# EAGLE board Komar (EAGLE 9.6.2)
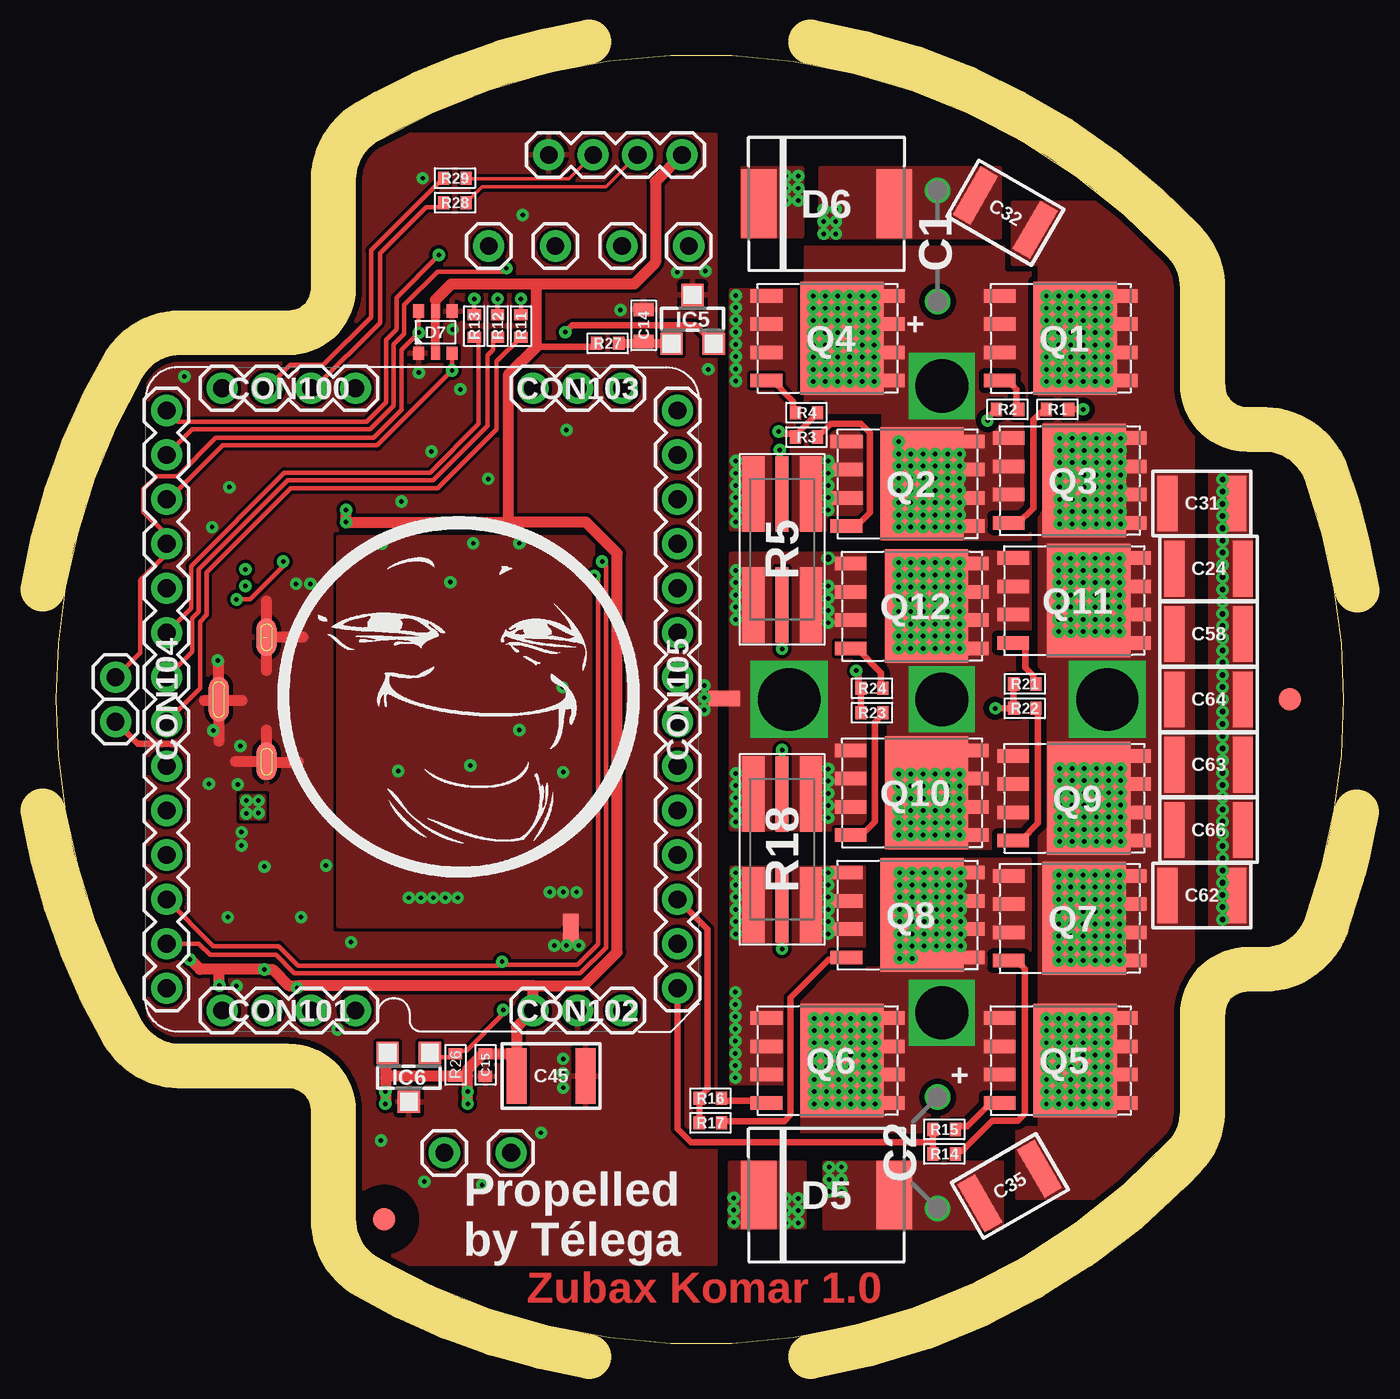
[diagram p0: board, top side]
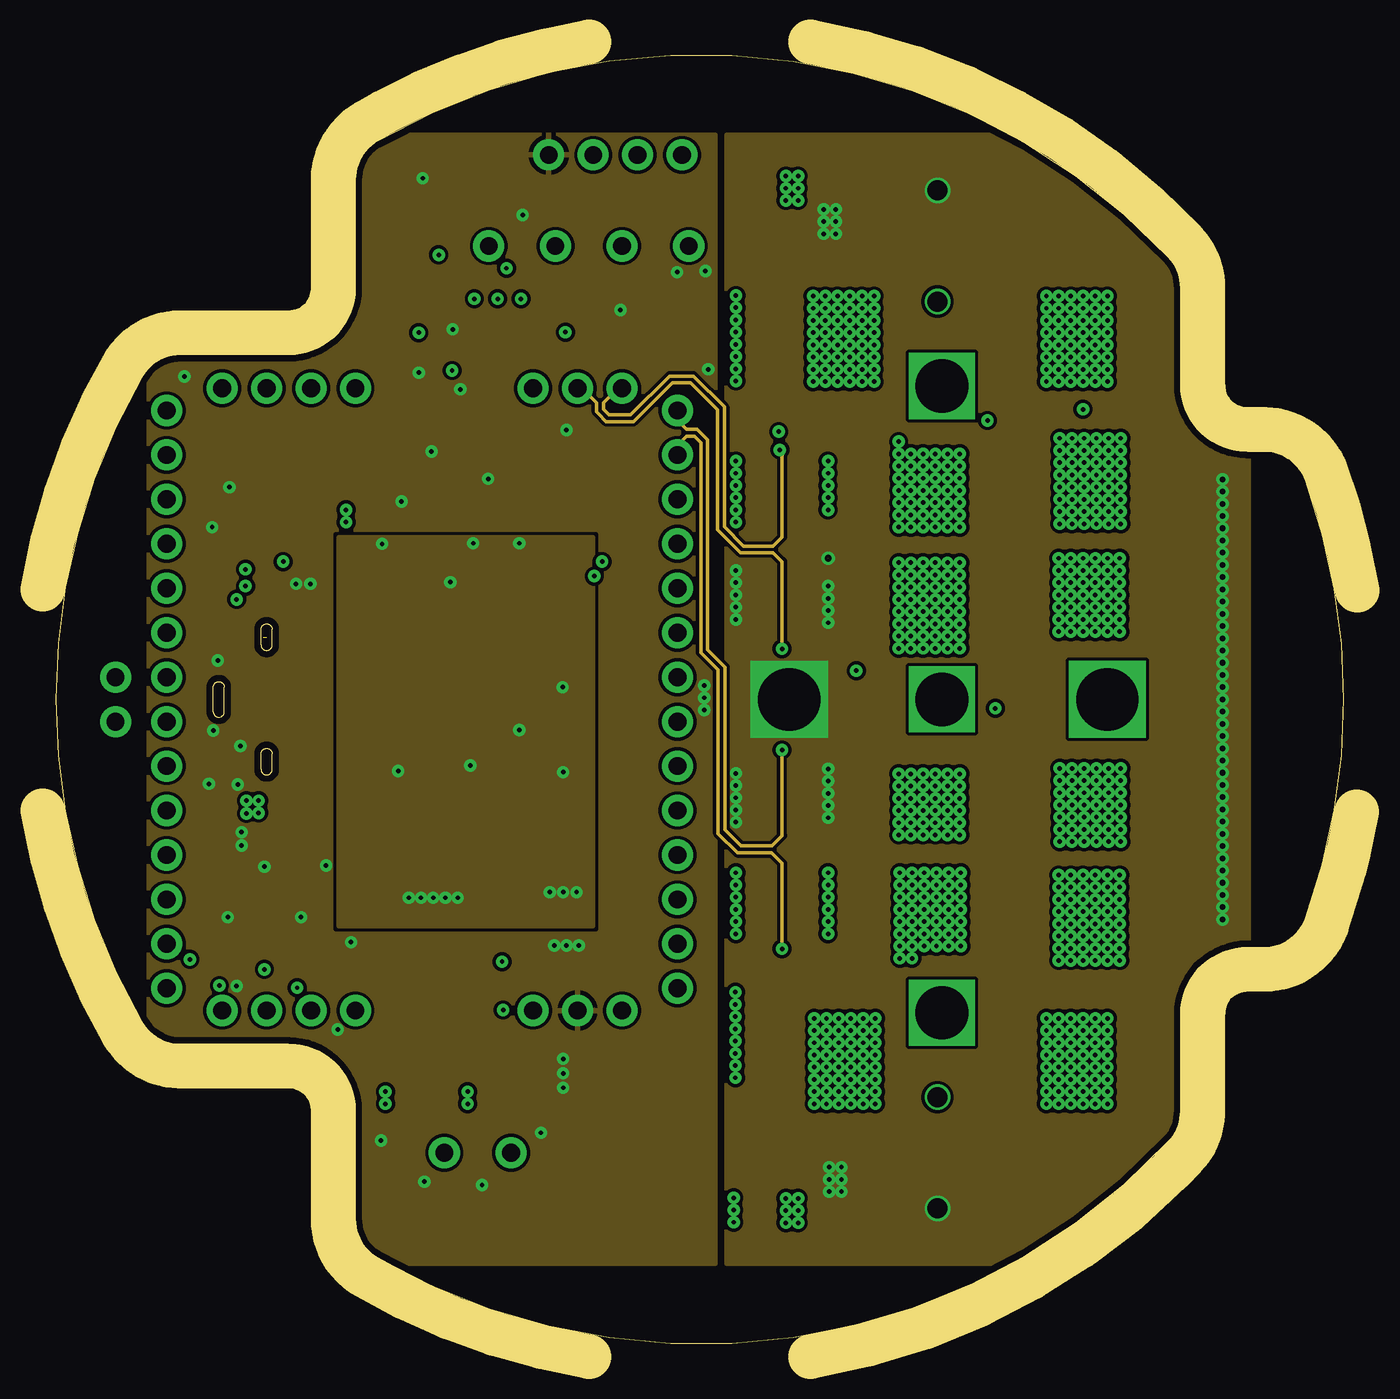
[diagram p1: board, inner layer Route2]
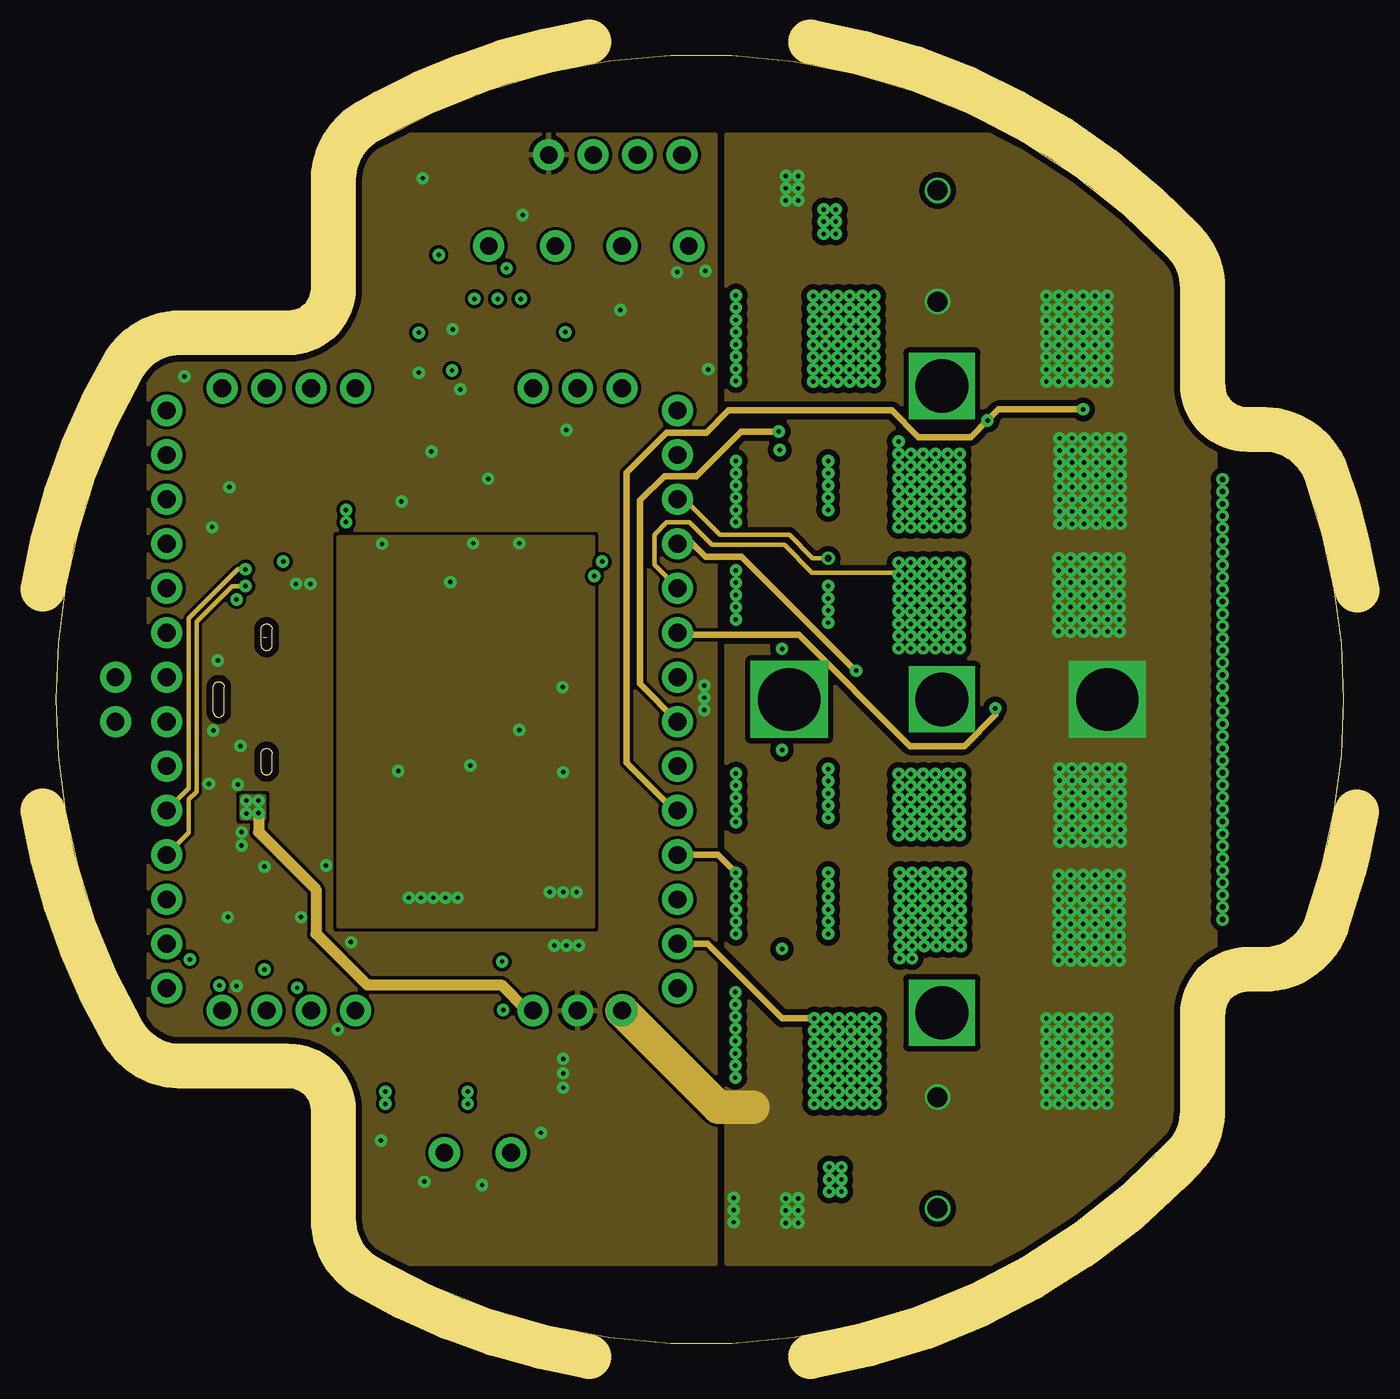
[diagram p2: board, inner layer Route15]
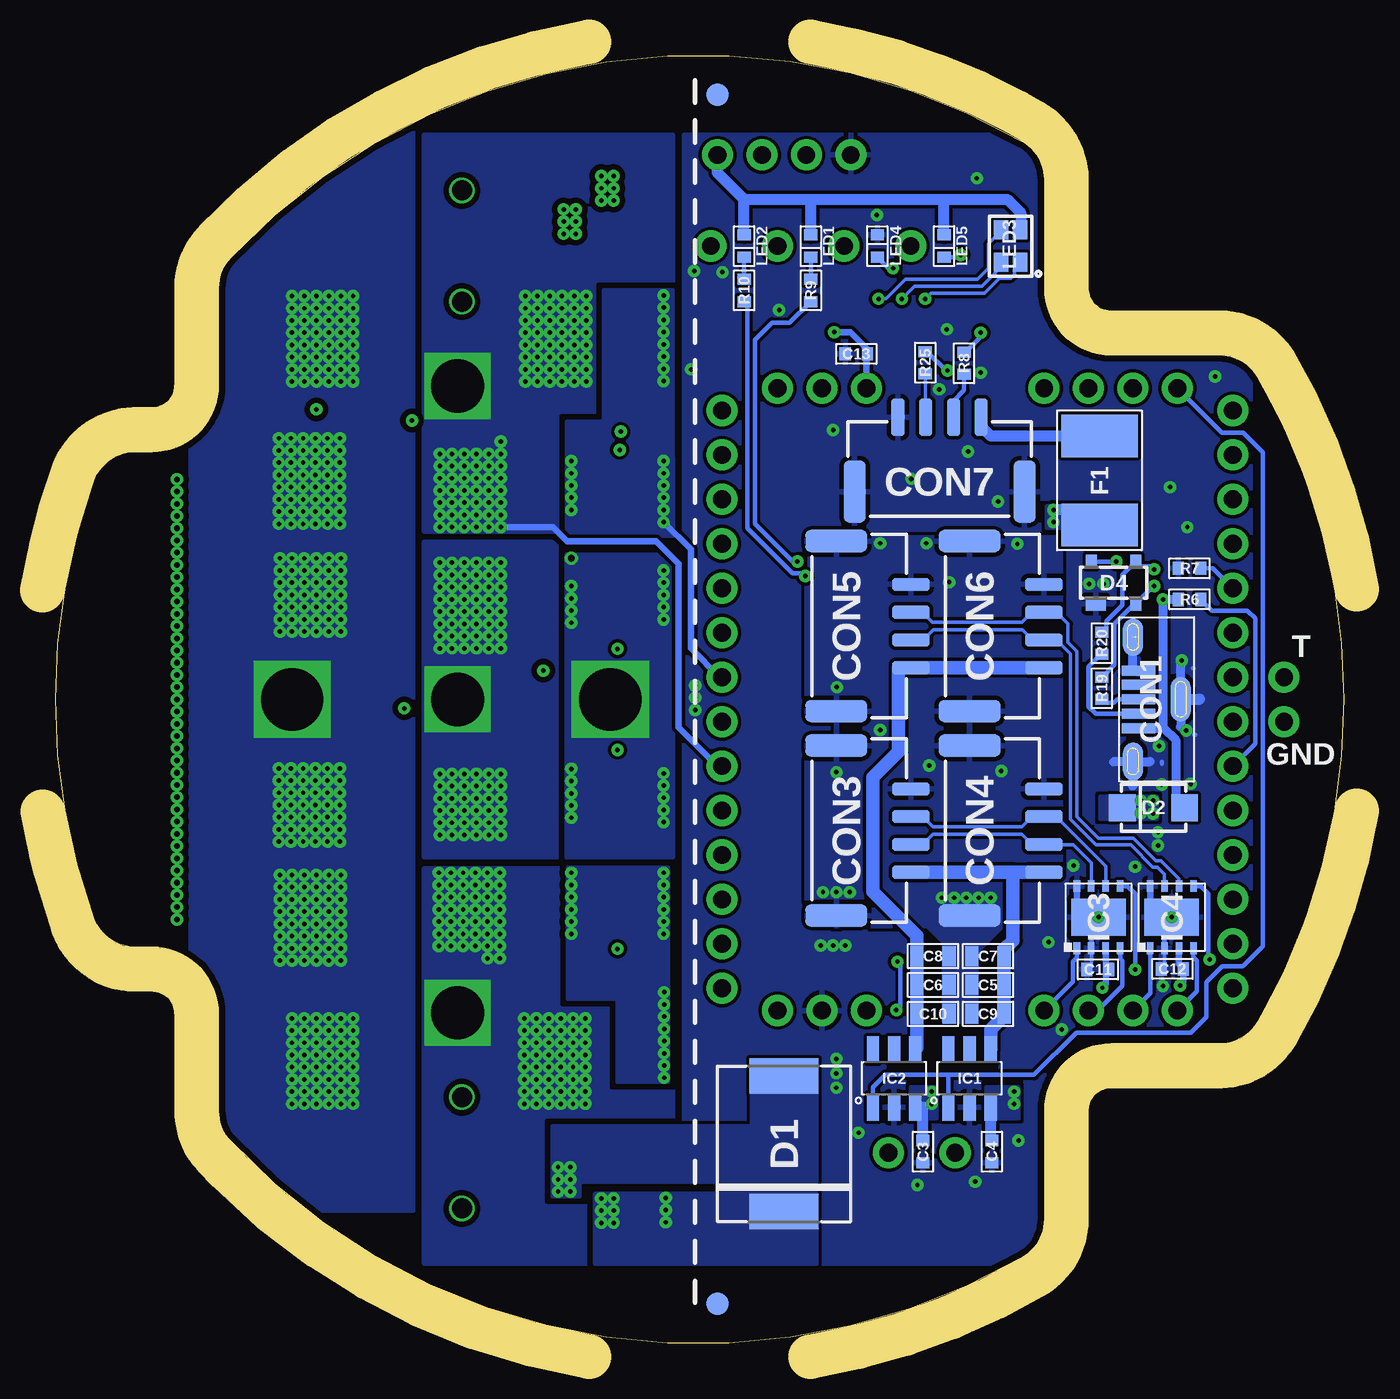
[diagram p3: board, bottom side, seen from below]

Size 57.99 x 57.94 mm. Coordinates in mm from the lower left corner, seen from the top.
Outline: 50.64,14.82 arc-90 53.64,17.82 54.4,17.82 arc70 56.28,19.14 arc40 56.28,38.8 arc70 54.4,40.12 53.64,40.12 arc-90 50.64,43.12 50.64,47.49 arc43 50.1,48.86 arc77 14.49,54.08 arc60 13.49,52.35 13.49,47.47 arc-90 10.49,44.47 5.62,44.47 arc60 3.89,43.47 arc60 3.89,14.47 arc60 5.62,13.47 10.49,13.47 arc-90 13.49,10.47 13.49,5.59 arc60 14.49,3.85 arc77 50.1,9.08 arc43 50.64,10.45 50.64,14.82
Copper layers (1+2*15+16): Top 0.035mm / dielectric 0.12mm / Route2 0.035mm / dielectric 1.2mm / Route15 0.035mm / dielectric 0.12mm / Bottom 0.035mm
Design rules "design rules *": minimum track width 0.15mm, minimum drill 0.2mm, track to track 0.15mm, track to pad 0.15mm, pad to pad 0.15mm, via to via 0.15mm, smd to smd 0.15mm, copper to edge 0.3mm, drill to drill 0.2mm, minimum pad ring 0.125mm, minimum via ring 0.125mm, stop-mask expansion 1mil, vias tented up to drill 0.31mm, thermal gap 8mil
Net classes: 1 HV: clearance 0.25 mm to class 0, clearance 0.25 mm
Milling: 57 lines

## Footprints (pad centres in the part's own frame; a part is rotated, then mirrored left to right if it is on the bottom)
SIDE_10X22 = drill 0.9: + -2.5,-0.5; - 2.5,-0.5
C0402 = smd 0.5 x 0.6: 1 -0.5,0; 2 0.5,0
C0603 = smd 0.6 x 0.9: 1 -0.725,0; 2 0.725,0
C1210 = smd 0.9 x 2.5: 1 -1.55,0; 2 1.55,0
1051330011 = smd 0.45 x 1.5: 1 -1.3,-0.25; 2 -0.65,-0.25; 3 0,-0.25; 4 0.65,-0.25; 5 1.3,-0.25 | smd 2 x 0.9: P$1 0,-2.15 | smd 1.7 x 0.9 bottom: P$2 -2.8,0; P$5 2.8,0 | smd 1.7 x 0.9: P$3 2.8,0; P$4 -2.8,0 | smd 2 x 0.9 bottom: P$6 0,-2.15
1X01-PTH-2 = drill 0.8 pad 1.4: 1 0,0
JST_GH-4P-STRAIGHT = smd 0.6 x 1.7: 1 -1.875,-2.9; 2 -0.625,-2.9; 3 0.625,-2.9; 4 1.875,-2.9 | smd 1 x 2.8: M$0 -3.825,0.45; M$1 3.825,0.45
1X04-PTH-2 = drill 0.8 pad 1.4: 1 -3,0; 2 -1,0; 3 1,0; 4 3,0
DO-214AB(SMC) = smd 1.6 x 3.1: A 3.05,0; C -3.05,0
SOD123F = smd 1.2 x 1.2: A -1.4,0; C 1.4,0
SOT143B = smd 0.9 x 0.6: 1 -0.8,-0.95 | smd 0.5 x 0.6: 2 1,-0.95; 3 1,0.95; 4 -1,0.95
SOT363 = smd 0.6 x 0.5: 1 -0.95,0.75; 3 -0.95,-0.75; 4 0.95,-0.75; 6 0.95,0.75 | smd 0.6 x 0.4: 2 -0.95,0; 5 0.95,0
F1812 = smd 1.9 x 3.45: P$1 -2,0; P$2 2,0
SOT26 = smd 1.2 x 0.55: 1 -1.3,0.95; 2 -1.3,0; 3 -1.3,-0.95; 4 1.3,-0.95; 5 1.3,0; 6 1.3,0.95
SOT782-1 = smd 0.525 x 0.3: 1 -1.4,0.975; 2 -1.4,0.325; 3 -1.4,-0.325; 4 -1.4,-0.975; 5 1.4,-0.975; 6 1.4,-0.325; 7 1.4,0.325; 8 1.4,0.975 | smd 1.65 x 2.45: PAD 0,0
SOT23B-3 = smd 1 x 1: 1 -0.95,-1.1; 2 0.95,-1.1; 3 0,1.1
LED0402 = smd 0.5 x 0.6: A -0.5,0; C 0.5,0
0606 = smd 0.65 x 0.85: + -0.425,-0.725; B 0.425,-0.725; G 0.425,0.725; R -0.425,0.725
MITOHONDRIK-TH = drill 0.8 pad 1.4: 1 -11.5,13; 2 -11.5,11; 3 -11.5,9; 4 -11.5,7; 5 -11.5,5; 6 -11.5,3; 7 -11.5,1; 8 -11.5,-1; 9 -11.5,-3; 10 -11.5,-5; 11 -11.5,-7; 12 -11.5,-9; 13 -11.5,-11; 14 -11.5,-13; 15 -9,-14; 16 -7,-14; 17 -5,-14; 18 3,-14; 19 5,-14; 20 7,-14; 21 9,-14; 22 11.5,-13; 23 11.5,-11; 24 11.5,-9; 25 11.5,-7; 26 11.5,-5; 27 11.5,-3; 28 11.5,-1; 29 11.5,1; 30 11.5,3; 31 11.5,5; 32 11.5,7; 33 11.5,9; 34 11.5,11; 35 11.5,13; 36 9,14; 37 7,14; 38 5,14; 39 3,14; 40 -5,14; 41 -7,14; 42 -9,14
HOLE_2.4 = drill 2.4 pad 2.8 square: 1 0,0
HOLE_2.8 = drill 2.8 pad 3.3 square: 1 0,0
PQFN8_5X6 = smd 1.42 x 0.61: 1 -2.9,1.905; 2 -2.9,0.635; 3 -2.9,-0.635; 4 -2.9,-1.905; 5 2.59,-1.905; 6 2.59,-0.635; 7 2.59,0.635; 8 2.59,1.905 | smd 3.75 x 5.1: P$1 0.5,0
R0402 = smd 0.5 x 0.6: 1 -0.5,0; 2 0.5,0
R2512-KELVIN = smd 3.4 x 1: 1 -2.5,1.3; 2 2.5,1.3; 11 -2.5,-1.3; 22 2.5,-1.3 | smd 3.4 x 0.6: S1 -2.5,0; S2 2.5,0
SENSE-0.6 = smd 0.1 x 0.1: IN 0,0 | drill 0.3 pad 0.6: SHELL 0,0
CONNECTION = smd 0.7 x 0.7: P$1 -0.35,0; P$2 0.35,0
FIDUCIA-MOUNT = smd 1.016 x 1.016: P$1 0,0

## Placement (x,y rotation side)
C1  330uF 63V  [SIDE_10X22]  39.2,49.37 90 top
C2  330uF 63V  [SIDE_10X22]  40.2,8.57 270 top
C3  0.1µF  [C0402]  18.95,8.62 270 bottom
C4  0.1µF  [C0402]  15.85,8.62 270 bottom
C5  4.7µF  [C0603]  16.03,16.12 0 bottom
C6  4.7µF  [C0603]  18.5,16.12 180 bottom
C7  4.7µF  [C0603]  16.03,17.42 0 bottom
C8  4.7µF  [C0603]  18.5,17.42 180 bottom
C9  4.7µF  [C0603]  16.03,14.82 0 bottom
C10  4.7µF  [C0603]  18.5,14.82 180 bottom
C11  0.1µF  [C0402]  11.08,16.82 180 bottom
C12  0.1µF  [C0402]  7.73,16.84 180 bottom
C13  0.1µF  [C0402]  21.95,44.52 0 bottom
C14  4.7µF  [C0603]  26.48,45.79 270 top
C15  0.1µF  [C0402]  19.35,12.52 90 top
C24  4.7µF  [C1210]  51.9,34.85 180 top
C31  4.7µF  [C1210]  51.6,37.79 180 top
C32  4.7µF  [C1210]  42.75,50.87 330 top
C35  4.7µF  [C1210]  42.95,7.07 30 top
C45  47µF  [C1210]  22.3,12.02 0 top
C58  4.7µF  [C1210]  51.9,31.91 180 top
C62  4.7µF  [C1210]  51.6,20.15 180 top
C63  4.7µF  [C1210]  51.9,26.03 180 top
C64  4.7µF  [C1210]  51.9,28.97 180 top
C66  4.7µF  [C1210]  51.9,23.09 180 top
CON1  USB-VERTICAL  [1051330011]  9.5,28.97 90 bottom
CON2  PINHEAD_1X01-2  [1X01-PTH-2]  2.7,29.97 270 top
CON3  CON-4P-TABS-STRAIGHT  [JST_GH-4P-STRAIGHT]  22.4,23.07 90 bottom
CON4  CON-4P-TABS-STRAIGHT  [JST_GH-4P-STRAIGHT]  16.4,23.07 90 bottom
CON5  CON-4P-TABS-STRAIGHT  [JST_GH-4P-STRAIGHT]  22.4,32.27 90 bottom
CON6  CON-4P-TABS-STRAIGHT  [JST_GH-4P-STRAIGHT]  16.4,32.27 90 bottom
CON7  CON-4P-TABS-STRAIGHT  [JST_GH-4P-STRAIGHT]  18.2,38.77 180 bottom
CON8  PINHEAD_1X04-2  [1X04-PTH-2]  25.2,53.47 0 top
CON9  PINHEAD_1X01-2  [1X01-PTH-2]  2.7,27.97 270 top
CON10  PINHEAD_1X01-2  [1X01-PTH-2]  19.5,49.37 0 top
CON11  PINHEAD_1X01-2  [1X01-PTH-2]  22.5,49.37 0 top
CON12  PINHEAD_1X01-2  [1X01-PTH-2]  25.5,49.37 0 top
CON13  PINHEAD_1X01-2  [1X01-PTH-2]  17.5,8.57 0 top
CON14  PINHEAD_1X01-2  [1X01-PTH-2]  20.5,8.57 0 top
CON15  PINHEAD_1X01-2  [1X01-PTH-2]  28.5,49.37 0 top
D1  SMC5K51A-M3/I  [DO-214AB(SMC)]  25.2,8.97 90 bottom
D2  NRVB120VLSFT1G  [SOD123F]  8.58,24.09 180 bottom
D4  DRTR5V0U2SR-7  [SOT143B]  10.38,34.22 0 bottom
D5  SMC5K51A-M3/I  [DO-214AB(SMC)]  34.7,6.67 0 top
D6  SMC5K51A-M3/I  [DO-214AB(SMC)]  34.7,51.27 0 top
D7  BAV99HDWQ-13  [SOT363]  17.1,45.49 90 top
F1  FUSE-1812  [F1812]  11,38.82 270 bottom
IC1  TPD3S014DBVR-SOT23-6  [SOT26]  16.85,11.92 90 bottom
IC2  TPD3S014DBVR-SOT23-6  [SOT26]  20.25,11.92 90 bottom
IC3  ATA6561-GBQW-N-HVSON8  [SOT782-1]  11.05,19.17 90 bottom
IC4  ATA6561-GBQW-N-HVSON8  [SOT782-1]  7.75,19.17 90 bottom
IC5  MCP9700AT-E/TTVAO-SOT23  [SOT23B-3]  28.68,46.07 0 top
IC6  11LC040T-E/TT  [SOT23B-3]  15.9,11.97 180 top
LED1  GREEN  [LED0402]  24,49.37 270 bottom
LED2  GREEN  [LED0402]  27,49.37 270 bottom
LED3  LTST-C19HE1WT  [0606]  15,49.37 180 bottom
LED4  ORANGE  [LED0402]  21,49.37 90 bottom
LED5  ORANGE  [LED0402]  18,49.37 270 bottom
MODULE2  MITOCHONDRIK_LV-TH  [MITOHONDRIK-TH]  16.5,28.97 180 top
PAD1  PAD-HOLE_2.4_SQUARE  [HOLE_2.4]  39.9,43.07 0 top
PAD2  PAD-HOLE_2.4_SQUARE  [HOLE_2.4]  39.9,14.87 180 top
PAD3  PAD-HOLE_2.4_SQUARE  [HOLE_2.4]  39.9,28.97 0 top
PAD4  PAD-HOLE_2.8_SQUARE  [HOLE_2.8]  33.03,28.97 180 top
PAD5  PAD-HOLE_2.8_SQUARE  [HOLE_2.8]  47.35,28.97 180 top
Q1  FDMS86368-F085  [PQFN8_5X6]  45.4,45.22 0 top
Q2  FDMS86368-F085  [PQFN8_5X6]  38.5,38.67 0 top
Q3  FDMS86368-F085  [PQFN8_5X6]  45.8,38.82 0 top
Q4  FDMS86368-F085  [PQFN8_5X6]  34.9,45.22 0 top
Q5  FDMS86368-F085  [PQFN8_5X6]  45.4,12.72 0 top
Q6  FDMS86368-F085  [PQFN8_5X6]  34.9,12.72 0 top
Q7  FDMS86368-F085  [PQFN8_5X6]  45.8,19.12 0 top
Q8  FDMS86368-F085  [PQFN8_5X6]  38.5,19.27 0 top
Q9  FDMS86368-F085  [PQFN8_5X6]  46,24.52 0 top
Q10  FDMS86368-F085  [PQFN8_5X6]  38.7,24.77 0 top
Q11  FDMS86368-F085  [PQFN8_5X6]  46,33.42 0 top
Q12  FDMS86368-F085  [PQFN8_5X6]  38.7,33.17 0 top
R1  4R3  [R0402]  45.1,42.02 180 top
R2  4R3  [R0402]  42.85,42.02 0 top
R3  4R3  [R0402]  33.8,40.77 0 top
R4  4R3  [R0402]  33.8,41.87 180 top
R5  1 mOhms  [R2512-KELVIN]  32.7,35.72 270 top
R6  1K  [R0402]  6.95,33.47 180 bottom
R7  1K5  [R0402]  6.95,34.87 180 bottom
R8  200R  [R0402]  17.1,44.09 270 bottom
R9  1K  [R0402]  24,47.37 90 bottom
R10  1K  [R0402]  27,47.37 90 bottom
R11  1K  [R0402]  20.95,45.77 270 top
R12  1K  [R0402]  19.9,45.77 270 top
R13  1K  [R0402]  18.85,45.77 270 top
R14  4R3  [R0402]  40,8.52 0 top
R15  4R3  [R0402]  40,9.62 0 top
R16  4R3  [R0402]  29.48,11.02 0 top
R17  4R3  [R0402]  29.48,9.92 0 top
R18  1 mOhms  [R2512-KELVIN]  32.7,22.22 90 top
R19  4R3  [R0402]  10.9,29.47 270 bottom
R20  4R3  [R0402]  10.9,31.49 270 bottom
R21  4R3  [R0402]  43.63,29.67 0 top
R22  4R3  [R0402]  43.63,28.57 0 top
R23  4R3  [R0402]  36.75,28.37 0 top
R24  4R3  [R0402]  36.75,29.47 0 top
R25  200R  [R0402]  18.85,44.12 270 bottom
R26  1K  [R0402]  18,12.52 270 top
R27  200R  [R0402]  24.85,44.99 180 top
R28  4R3  [R0402]  17.98,51.32 180 top
R29  4R3  [R0402]  17.98,52.42 180 top
S1  SENSE  [SENSE-0.6]  34.78,35.32 0 top
U$1  CONNECTION-SMD  [CONNECTION]  23.2,18.62 90 top
U$2  [YOBA_17X17]  10,20.97 0 top
U$3  CONNECTION-SMD  [CONNECTION]  30.1,29.02 0 top
U$5  FIDUCIALMOUNT  [FIDUCIA-MOUNT]  55.55,28.97 0 top
U$6  FIDUCIALMOUNT  [FIDUCIA-MOUNT]  14.8,5.57 0 top
U$7  FIDUCIALMOUNT  [FIDUCIA-MOUNT]  28.2,56.17 0 bottom
U$11  FIDUCIALMOUNT  [FIDUCIA-MOUNT]  28.2,1.77 0 bottom

## Library data of the parts
C1 C2 = mitohondrique; AEC-Q: AEC-Q200; DIGIKEY#: 565-2043-ND; LIFETIME: 7000 Hrs @ 105°C; MANF: United Chemi-Con; MANF#: ELXZ630ELL331MK20S; OPERATING_TEMP: -55°C ~ 105°C; PACKAGE: radial
C3 C4 C11 C12 = rc; AEC-Q: AEC-Q200; DIGIKEY#: 490-7998-1-ND; MANF: Murata Electronics; MANF#: GCM155R71C104KA55J; PACKAGE: 0402; VOLTAGE: 16V
C5-C10 C14 = rc; AEC-Q: AEC-Q200; DIGIKEY#: 490-12289-1-ND; MANF: Murata Electronics; MANF#: GRT188C81C475KE13D; OPERATING_TEMP: -55°C ~ 105°C; PACKAGE: 0603; VOLTAGE: 16V
C13 C15 = rc; AEC-Q: AEC-Q200; DIGIKEY#: 490-7998-1-ND; MANF: Murata Electronics; MANF#: GCM155R71C104KA55J; OPERATING_TEMP: -55°C ~ 125°C; PACKAGE: 0402; VOLTAGE: 16V
C24 C31 C32 C35 C58 C62-C64 C66 = rc; AEC-Q: AEC-Q200; DIGIKEY#: 490-14484-1-ND; MANF: Murata Electronics; MANF#: GCM32DC72A475KE02L; OPERATING_TEMP: -55°C ~ 125°C; PACKAGE: 1210; VOLTAGE: 100V
C45 = rc; ASSY: DNM; DIGIKEY#: 490-4844-1-ND; MANF: Murata Electronics; MANF#: GCM32ER70J476KE19L; OPERATING_TEMP: -55°C ~ 125°C; PACKAGE: 1210; VOLTAGE: 6.3 V
CON1 = Connectors; AEC-Q: ---; DIGIKEY#: WM10134TR-ND; MANF: Molex LLC; MANF#: 1051330011; OPERATING_TEMP: -35°C ~ 85°C
CON2 CON8-CON15 = pinhead
CON3-CON7 = Connectors; AEC-Q: ---; DIGIKEY#: 455-1580-2-ND; MANF: JST Sales America Inc; MANF#: BM04B-GHS-TBT(LF)(SN)(N); OPERATING_TEMP: -25°C ~ 85°C
D1 = TVS_diodes; AEC-Q: AEC-Q101; DIGIKEY#: SMC5K51A-M3/IGICT-ND; MANF: Vishay Semiconductor Diodes Division; MANF#: SMC5K51A-M3/I; REVERS_STANDOFF_V: 51V
D2 = Diodes; AEC-Q: AEC-Q101; DIGIKEY#: NRVB120VLSFT1GOSCT-ND; MANF: ON Semiconductor; MANF#: NRVB120VLSFT1G; OPERATING_TEMP: -65°C ~ 125°C
D4 = TVS_diodes; AEC-Q: AEC-Q101; DIGIKEY#: DRTR5V0U2SR-7DICT-ND; MANF: Diodes Incorporated; MANF#: DRTR5V0U2SR-7; OPERATING_TEMP: -65°C ~ 150°C (TJ)
D5 D6 = TVS_diodes; AEC-Q: AEC-Q101; ASSY: DNM; DIGIKEY#: SMC5K51A-M3/IGICT-ND; MANF: Vishay Semiconductor Diodes Division; MANF#: SMC5K51A-M3/I; REVERS_STANDOFF_V: 51V
D7 = Diodes; AEC-Q: AEC-Q101; DIGIKEY#: BAV99HDWQ-13DICT-ND; MANF: Diodes Incorporated; MANF#: BAV99HDWQ-13
F1 = rc; AEC-Q: AEC-Q200; DIGIKEY#: MF-MSMF010-2CT-ND; HOLD_CURRENT: 100 mA; MANF: Bourns Inc.; MANF#: MF-MSMF010-2; PACKAGE: 1812; TIME_TO_TRIP: 1.5 S; TRIP_CURRENT: 300 mA
IC1 IC2 = misc; AEC-Q: ---; DIGIKEY#: 296-38835-1-ND; MANF: Texas Instruments; MANF#: TPD3S014DBVR; OPERATING_TEMP: -40°C ~ 85°C
IC3 IC4 = serial_interfaces; AEC-Q: AEC-Q100; DATA_RATE: 5Mbps; DIGIKEY#: ATA6561-GBQW-NCT-ND; MANF: Microchip Technology; MANF#: ATA6561-GBQW-N; OPERATING_TEMP: -40°C ~ 150°C (TJ); VOLTAGE_SUPPLY: 4.5V ~ 5.5V
IC5 = misc; AEC-Q: AEC-Q100; DIGIKEY#: MCP9700AT-E/TTVAOTR-ND; MANF: Microchip Technology; MANF#: MCP9700AT-E/TTVAO
IC6 = misc; AEC-Q: ---; DIGIKEY#: 11LC040T-E/TTCT-ND; MANF: Microchip Technology; MANF#: 11LC040T-E/TT; OPERATING_TEMP: -40°C ~ 125°C (TA)
LED1 LED2 = rc; AEC-Q: ---; COLOR: GREEN; DIGIKEY#: 1830-IN-S42BT5GCT-ND; MANF: Inolux; MANF#: IN-S42BT5G
LED3 = misc; AEC-Q: ---; DIGIKEY#: 160-2162-1-ND; MANF: Lite-On Inc; MANF#: LTST-C19HE1WT; OPERATING_TEMP: -20°C ~ +80°C
LED4 LED5 = rc; AEC-Q: ---; COLOR: Amber; DIGIKEY#: 1830-IN-S42BT5ACT-ND; MANF: Inolux; MANF#: IN-S42BT5A
MODULE2 = zubax_modules; MANF: Zubax Robotics; MANF#: Mitochondrik
PAD1-PAD5 = PADS
Q1-Q12 = mosfet; AEC-Q: AEC-Q101; DIGIKEY#: FDMS86368-F085CT-ND; MANF: ON Semiconductor; MANF#: FDMS86368-F085; OPERATING_TEMP: -55°C ~ 175°C (TJ); PACKAGE: PQFN8-5x6
R1-R4 R14-R17 R19-R24 = rc; AEC-Q: AEC-Q200; DIGIKEY#: P4.3JCT-ND; MANF: Panasonic Electronic Components; MANF#: ERJ-2GEJ4R3X; OPERATING_TEMP: -55°C ~ 155°C; PACKAGE: 0402; TOLERANCE: 5%
R5 R18 = SHUNT_RESISTORS; AEC-Q: AEC-Q200; DIGIKEY#: CRE2512-FZ-R001E-3CT-ND; MANF: Bourns Inc.; MANF#: CRE2512-FZ-R001E-3; OPERATING_TEMP: -55°C ~ 170°C; POWER: 3W; TC: ±50ppm/°C; TOLERANCE: ±1%
R6 R9-R13 R26 = rc; AEC-Q: AEC-Q200; DIGIKEY#: P1.00KLCT-ND; MANF: Panasonic Electronic Components; MANF#: ERJ-2RKF1001X; OPERATING_TEMP: -55°C ~ 155°C; PACKAGE: 0402; TOLERANCE: 5%
R7 = rc; AEC-Q: AEC-Q200; DIGIKEY#: P1.50KLCT-ND; MANF: Panasonic Electronic Components; MANF#: ERJ-2RKF1501X; PACKAGE: 0402; TOLERANCE: 1%
R8 R25 R27 = rc; AEC-Q: AEC-Q200; DIGIKEY#: P200JCT-ND; MANF: Panasonic Electronic Components; MANF#: ERJ-2GEJ201X; OPERATING_TEMP: -55°C ~ 155°C; PACKAGE: 0402; TOLERANCE: 5%
R28 R29 = rc; AEC-Q: 1; DIGIKEY#: 2; PACKAGE: 0402; TOLERANCE: 1%
S1 U$1 U$3 U$5-U$7 U$11 = misc; BOM: EXCLUDE
U$2 = logo

## Nets
AGH1 [HV]: Q7.4 R14.2
AGH2 [HV]: Q5.4 R15.2
AGL1: Q8.4 R17.2
AGL2: Q6.4 R16.2
BEC_ENABLE_OUT: IC1.1 IC2.1 MODULE2.21
BGH1 [HV]: Q3.4 R1.2
BGH2 [HV]: Q1.4 R2.2
BGL1: Q4.4 R4.2
BGL2: Q2.4 R3.2
CAN1_LED: IC6.1 MODULE2.33 R10.1 R26.1
CAN1_RX: IC3.4 MODULE2.38
CAN1_TX: IC3.1 MODULE2.39
CAN1_VDD: C5.2 C7.2 C9.2 CON3.1 CON4.1 IC1.4
CAN2_LED: MODULE2.34 R9.1
CAN2_RX: IC4.4 MODULE2.36
CAN2_TX: IC4.1 MODULE2.37
CAN2_VDD: C6.2 C8.2 C10.2 CON5.1 CON6.1 IC2.4
CGH1 [HV]: Q11.4 R21.2
CGH2 [HV]: Q9.4 R22.2
CGL1: Q12.4 R24.2
CGL2: Q10.4 R23.2
GAIN_OUT: LED5.C MODULE2.22
GATE_ENABLE_OUT: LED4.A MODULE2.23
GND: C3.2 C4.2 C11.2 C12.2 C13.1 C14.1 C15.1 C45.2 CON1.5 CON1.P$1 CON1.P$2 CON1.P$3 CON1.P$4 CON1.P$5 CON1.P$6 CON7.4 CON7.M$0 CON7.M$1 CON8.1 CON9.1 D4.1 D7.1 D7.4 IC1.2 IC2.2 IC3.2 IC3.8 IC3.PAD IC4.2 IC4.8 IC4.PAD IC5.3 IC6.3 LED4.C MODULE2.41 R7.2 U$1.P$1 U$3.P$1
GNDD: C5.1 C6.1 C7.1 C8.1 C9.1 C10.1 CON3.4 CON3.M$0 CON3.M$1 CON4.4 CON4.M$0 CON4.M$1 CON5.4 CON5.M$0 CON5.M$1 CON6.4 CON6.M$0 CON6.M$1 U$1.P$2
GPIO1: CON2.1 D7.6 MODULE2.25 R8.1
GPIO2: D7.3 MODULE2.24 R25.1
LED_BLUE: MODULE2.29 R11.2
LED_GREEN: MODULE2.28 R12.2
LED_RED: MODULE2.27 R13.2
N$5: MODULE2.30 R6.1
N$6: CON7.1 F1.P$1
N$10: C14.2 IC5.1 R27.1
N$16: LED2.C R10.2
N$17: LED1.C R9.2
N$18: MODULE2.26 R7.1
N$19: CON7.2 R8.2
N$20: CON7.3 R25.2
N$21: CON3.2 CON4.2 IC3.7
N$22: CON3.3 CON4.3 IC3.6
N$25: CON8.3 R28.1
N$26: CON8.2 R29.1
N$44: CON5.3 CON6.3 IC4.6
N$46: CON5.2 CON6.2 IC4.7
N$51: D4.3 MODULE2.31 R20.1
N$52: CON1.3 R19.2
N$54: CON1.2 R20.2
N$55: D4.2 MODULE2.32 R19.1
N$58: LED3.R R13.1
N$59: LED3.G R12.1
N$60: LED3.B R11.1
PGND: C1.- C2.- C24.1 C31.1 C32.1 C35.1 C58.1 C62.1 C63.1 C64.1 C66.1 D1.A D5.A D6.A PAD4.1 Q10.1 Q10.2 Q10.3 Q12.1 Q12.2 Q12.3 R5.2 R5.22 R18.2 R18.22 S1.SHELL U$3.P$2
PHASE_A [HV]: MODULE2.2 PAD2.1 Q5.1 Q5.2 Q5.3 Q6.5 Q6.6 Q6.7 Q6.8 Q6.P$1 Q7.1 Q7.2 Q7.3 Q8.5 Q8.6 Q8.7 Q8.8 Q8.P$1
PHASE_A_CURRENT_SHUNT_N: MODULE2.13 R18.S1
PHASE_A_CURRENT_SHUNT_P: MODULE2.14 R18.S2
PHASE_A_GATE_HIGH [HV]: MODULE2.1 R14.1 R15.1
PHASE_A_GATE_LOW: MODULE2.3 R16.1 R17.1
PHASE_A_GND: MODULE2.4 Q6.1 Q6.2 Q6.3 Q8.1 Q8.2 Q8.3 R18.1 R18.11
PHASE_B [HV]: MODULE2.6 PAD1.1 Q1.1 Q1.2 Q1.3 Q2.5 Q2.6 Q2.7 Q2.8 Q2.P$1 Q3.1 Q3.2 Q3.3 Q4.5 Q4.6 Q4.7 Q4.8 Q4.P$1
PHASE_B_CURRENT_SHUNT_N: MODULE2.15 R5.S1
PHASE_B_CURRENT_SHUNT_P: MODULE2.16 R5.S2
PHASE_B_GATE_HIGH [HV]: MODULE2.5 R1.1 R2.1
PHASE_B_GATE_LOW: MODULE2.7 R3.1 R4.1
PHASE_B_GND: MODULE2.8 Q2.1 Q2.2 Q2.3 Q4.1 Q4.2 Q4.3 R5.1 R5.11
PHASE_C [HV]: MODULE2.10 PAD3.1 Q9.1 Q9.2 Q9.3 Q10.5 Q10.6 Q10.7 Q10.8 Q10.P$1 Q11.1 Q11.2 Q11.3 Q12.5 Q12.6 Q12.7 Q12.8 Q12.P$1
PHASE_C_GATE_HIGH [HV]: MODULE2.9 R21.1 R22.1
PHASE_C_GATE_LOW: MODULE2.11 R23.1 R24.1
PHASE_C_GND: MODULE2.12 S1.IN
TEMPERATURE_SENSOR: C13.2 IC5.2 MODULE2.17
UART_RX: MODULE2.20 R29.2
UART_TX: MODULE2.19 R28.2
USB_VBUS: CON1.1 D2.A D4.4 R6.2
VDC [HV]: C1.+ C2.+ C24.2 C31.2 C32.2 C35.2 C58.2 C62.2 C63.2 C64.2 C66.2 D1.C D5.C D6.C MODULE2.42 PAD5.1 Q1.5 Q1.6 Q1.7 Q1.8 Q1.P$1 Q3.5 Q3.6 Q3.7 Q3.8 Q3.P$1 Q5.5 Q5.6 Q5.7 Q5.8 Q5.P$1 Q7.5 Q7.6 Q7.7 Q7.8 Q7.P$1 Q9.5 Q9.6 Q9.7 Q9.8 Q9.P$1 Q11.5 Q11.6 Q11.7 Q11.8 Q11.P$1
VDD_5V: C3.1 C4.1 C11.1 C12.1 C15.2 C45.1 CON8.4 D2.C D7.2 D7.5 F1.P$2 IC1.3 IC2.3 IC3.3 IC3.5 IC4.3 IC4.5 IC6.2 LED1.A LED2.A LED3.+ LED5.A MODULE2.40 R26.2 R27.2

## Tracks (layer width: path | path; a pad name or v marks a point on that pad's centre or on a via)
AGH1
  Top 0.25: 43.4,17.06 43.05,17.06 Q7.4
  Top 0.3: 43.4,17.06 43.63,16.84 43.63,10.32 43.32,10.01 42.17,10.01 40.83,8.67 40.65,8.67 R14.2
AGH2
  Top 0.3: Q5.4 42.36,10.67 41.95,10.67 41.05,9.77 40.65,9.77 R15.2
AGL1
  Top 0.2: 29.98,9.99 R17.2 | 35.5,17.26 Q8.4
  Top 0.3: 35.5,17.26 34.8,17.26 33.08,15.54 33.08,10.27 32.8,9.99 29.98,9.99
AGL2
  Top 0.25: 30.08,10.92 R16.2
  Top 0.3: Q6.4 31.9,10.92 30.08,10.92
BEC_ENABLE_OUT
  Bottom 0.2: 17.8,12.07 13.95,12.07 12.05,13.97 6.9,13.97 6.2,14.67 6.2,16.24 5.48,16.97 4.55,16.97 3.65,17.87 3.65,40.09 4.53,40.97 5.5,40.97 MODULE2.21 | 17.8,12.07 20.65,12.07 21.2,11.52 IC2.1 | IC1.1 17.8,12.07
BGH1
  Top 0.3: Q3.4 43.35,36.91 44.01,37.58 44.01,41.55 44.33,41.87 44.45,41.87 R1.2
BGH2
  Top 0.3: R2.2 43.25,42.12 43.25,42.92 42.86,43.31 Q1.4
BGL1
  Top 0.3: R4.2 33.2,41.97 33.2,42.39 32.23,43.36 32.05,43.36 Q4.4
BGL2
  Top 0.3: R3.2 34.9,41.37 36.24,41.37 36.65,40.96 36.65,37.37 36.05,36.76 Q2.4
CAN1_LED  (via drill 0.2 pad 0.55)
  Top 0.2: IC6.1 17.05,12.87 17.85,12.87 R26.1 18.15,13.17 18.5,13.17 20.15,14.82 v20.15,14.99 | MODULE2.33 7.1,17.87 10.05,17.87 10.93,16.99 19.93,16.99 v20.1,17.17 20.1,17.14 20.23,17.02 23.5,17.02 24.43,17.95 24.43,34.34 v24.25,34.52
  Bottom 0.2: v20.15,14.99 19.98,15.17 19.98,17.04 v20.1,17.17 | v24.25,34.52 24.38,34.64 24.82,34.64 26.85,36.68 26.85,46.72 R10.1
CAN1_RX
  Bottom 0.2: IC3.4 10.08,17.32 9.98,17.22 9.98,16.09 11.1,14.97 MODULE2.38
CAN1_TX
  Bottom 0.2: IC3.1 12.03,17.34 12.2,17.17 12.2,16.27 MODULE2.39
CAN1_VDD
  Bottom 0.6: IC1.4 15.9,14.12 15.3,14.72 C9.2 C5.2 C7.2 15.3,17.72 14.9,18.12 14.9,21.19 | 14.9,21.19 CON4.1 | 14.9,21.19 CON3.1
CAN2_LED  (via drill 0.2 pad 0.55)
  Top 0.2: MODULE2.34 6.45,17.97 6.95,17.47 9.93,17.47 10.75,16.64 23.62,16.64 24.78,17.8 24.78,34.99 v24.6,35.17
  Bottom 0.2: v24.6,35.17 24.8,35.17 26.5,36.87 26.5,45.16 25.74,45.92 24.95,45.92 R9.1
CAN2_RX
  Bottom 0.2: IC4.4 6.78,17.37 6.63,17.22 6.63,15.84 MODULE2.36
CAN2_TX
  Bottom 0.2: IC4.1 8.73,15.74 MODULE2.37
CAN2_VDD
  Bottom 0.6: IC2.4 19.23,13.29 C10.2 C6.2 C8.2 19.23,18.34 21.2,20.32 21.2,25.47 20.05,26.62 20.05,30.39 CON5.1 CON6.1
CGH1
  Top 0.25: 43.65,31.27 43.41,31.51 Q11.4
  Top 0.3: R21.2 44.03,29.77 44.03,30.02 43.65,30.4 43.65,31.27
CGH2
  Top 0.3: Q9.4 43.45,22.61 44.23,23.39 44.23,28.47 R22.2
CGL1
  Top 0.3: Q12.4 36.06,31.26 37.15,30.18 37.15,29.57 R24.2
CGL2
  Top 0.3: Q10.4 36.27,22.86 36.88,23.47 36.88,27.94 37.25,28.32 R23.2
GAIN_OUT  (via drill 0.2 pad 0.55)
  Top 0.2: MODULE2.22 5.5,41.47 14,41.47 14.88,42.34 14.88,45.14 15.35,45.62 15.35,47.04 17.25,48.94 v17.25,48.97
  Bottom 0.2: LED5.C 17.35,48.87 v17.25,48.97
GATE_ENABLE_OUT  (via drill 0.2 pad 0.55)
  Top 0.2: MODULE2.23 6.15,41.12 14.17,41.12 15.23,42.17 15.23,44.94 15.7,45.42 15.7,46.72 17.2,48.22 20.15,48.22 v20.3,48.37
  Bottom 0.2: LED4.A 20.5,48.37 v20.3,48.37
GND  (via drill 0.2 pad 0.55)  (2 unrouted)
  Top 0.3: CON9.1 3.7,26.97 5.4,26.97
  Top 0.4: 7.35,30.67 v7.3,30.72 | CON1.P$6 8.4,28.97
  Top 0.5: CON1.P$4 8.1,26.17 | 10.93,26.14 9.53,26.14 CON1.P$4 | CON1.P$4 9.5,27.59 | 7.35,30.67 CON1.P$6 7.35,27.09 | 9.5,30.27 9.5,33.39 | 11.13,31.77 9.35,31.77 | 8.4,28.92 6.7,28.92
  Bottom 0.15: C12.2 8.08,16.99 IC4.2 | C11.2 11.38,17.02 IC3.2
  Bottom 0.2: 6.75,27.37 6.7,27.37 | 6.75,30.37 6.8,30.37 | 8.2,26.17 8.2,26.07 | IC4.2 8.08,18.84 IC4.PAD | IC3.2 11.38,18.84 11.08,19.14 IC3.PAD | CON1.5 9.5,30.27 9.5,30.37
  Bottom 0.3: IC4.8 8.73,19.17 IC4.PAD | IC3.8 12.03,19.14 11.08,19.14
  Bottom 0.4: 7.35,30.54 CON1.P$6 7.35,27.74 | CON1.P$4 8.73,26.17 | CON1.P$4 10.35,26.17 10.38,26.14 | CON1.P$4 9.5,25.09 9.53,25.07 | 9.5,30.37 CON1.P$5
  Bottom 0.5: CON1.P$6 6.53,28.97 6.5,28.99
  other vias: 5.8,43.49 8.38,22.99 8.2,25.14 7.83,38.52 27.98,48.19 7.1,27.57 8.33,26.87 8.38,22.39 9.4,21.44 12.18,21.49 29.38,43.82 23,41.09 19.48,38.89 23.55,17.89 22.85,12.79 22.85,12.14 22.85,11.49 7.05,36.72 13.3,18.04 29.25,48.24 15.58,37.87 11.48,34.17 10.83,34.17 17.88,45.62 16.35,43.67 16.53,52.42 23,17.89 6.9,25.17 18.23,42.92 16.93,40.12 7.75,19.17 29.2,29.59 29.2,29.04 29.2,28.49 11.05,19.17 22.45,17.89 12.7,14.12 8.15,16.07 21.03,50.77 14.65,9.12 19.2,7.12 21.85,9.47 16.6,7.27 25.43,46.49
  pour Top (rank 5): 29.7,3.57 29.7,54.37 4.2,54.37 4.2,3.57
  pour Bottom (rank 5): 29.7,3.57 29.7,54.37 4.2,54.37 4.2,3.57
  pour Route2 (rank 5): 4.2,54.37 4.2,3.57 29.7,3.57 29.7,54.37
  pour Route15 (rank 5): 29.7,3.57 29.7,54.37 4.2,54.37 4.2,3.57
GNDD  (via drill 0.2 pad 0.55)
  other vias: 22.85,20.29 16.45,20.04 17.78,34.24 18.8,35.99 20.88,35.99 14.7,35.97 22.85,25.69 20.88,27.59 22.83,29.52 18.68,25.99 15.43,25.74 15.9,20.04 17,20.04 17.55,20.04 18.1,20.04 23.45,20.29 22.25,20.29
  pour Top: 12.75,36.27 24.2,36.27 24.2,18.77 12.75,18.77
  pour Route2: 12.75,36.27 24.2,36.27 24.2,18.77 12.75,18.77
  pour Route15: 12.75,36.27 24.2,36.27 24.2,18.77 12.75,18.77
  pour Bottom: 24.2,36.27 12.75,36.27 12.75,18.77 24.2,18.77
  pour Bottom (no thermals): 18,14.47 16.55,14.47 16.55,17.59 15.45,18.69 15.45,20.27 18.75,20.27 18.75,18.79 18,18.04
GPIO1  (via drill 0.2 pad 0.55)
  Top 0.2: D7.6 v16.35,45.47 15.58,44.69 15.58,41.99 14.33,40.74 7.22,40.74 5.49,39.02 4.55,39.02 3.95,38.42 3.95,37.42 5,36.37 MODULE2.25 5,35.52 3.8,34.32 3.8,31.07 CON2.1
  Bottom 0.2: R8.1 17.05,44.59 16.35,45.29 v16.35,45.47
GPIO2  (via drill 0.2 pad 0.55)
  Top 0.2: D7.3 v17.85,43.77 14.48,40.39 7.53,40.39 5.1,37.97 MODULE2.24
  Bottom 0.2: R25.1 18.78,44.62 17.93,43.77 v17.85,43.77
LED_BLUE
  Top 0.2: MODULE2.29 6.5,29.47 6.5,32.47 6.8,32.77 6.8,34.68 10.59,38.47 17.19,38.47 19.85,41.13 19.85,44.17 R11.2
LED_GREEN
  Top 0.2: R12.2 19.7,45.07 19.7,44.69 19.45,44.44 19.45,41.27 17,38.82 10.45,38.82 6.45,34.82 6.45,32.92 6.15,32.62 6.15,31.12 MODULE2.28
LED_RED
  Top 0.2: R13.2 19.05,45.07 19.05,41.37 16.85,39.17 10.3,39.17 6.1,34.97 6.1,33.07 MODULE2.27
N$5
  Bottom 0.2: R6.1 6.45,33.32 6.3,33.32 5.95,32.97 4.35,32.97 4,32.62 4,26.97 MODULE2.30
N$6
  Bottom 0.15: CON7.1 16.33,41.24
  Bottom 0.5: F1.P$1 15.9,40.82 16.33,41.24
N$10
  Top 0.4: IC5.1 26.58,44.97 C14.2 26.4,44.99 R27.1
N$16
  Bottom 0.2: LED2.C R10.2
N$17
  Bottom 0.2: LED1.C R9.2
N$18
  Bottom 0.2: R7.1 5.9,34.87 MODULE2.26
N$19
  Bottom 0.15: CON7.2 17.58,42.39
  Bottom 0.2: R8.2 17.1,42.87 17.58,42.39
N$20
  Bottom 0.15: R25.2 18.85,41.69 CON7.3
N$21
  Bottom 0.15: IC3.7 11.38,21.62 12.18,22.42 13.3,22.42 13.33,22.44 CON4.2 14.05,22.44 14.5,22.89 18.5,22.89 18.95,22.44 CON3.2
N$22
  Bottom 0.15: IC3.6 10.73,21.46 12.96,23.69 CON4.3 14.05,23.69 14.5,23.24 18.5,23.24 18.95,23.69 CON3.3
N$25
  Top 0.15: R28.1 19.2,52.04 24.78,52.04 CON8.3
N$26
  Top 0.15: R29.1 18.5,52.39 23.13,52.39 CON8.2
N$44
  Bottom 0.15: CON5.3 18.98,32.89 18.53,32.44 14.5,32.44 14.05,32.89 CON6.3 12.95,32.89 12.43,32.37 12.43,31.54 12.03,31.14 12.03,23.69 11.05,22.72 9.48,22.72 8.48,21.72 8.25,21.72 7.43,20.89 IC4.6
N$46
  Bottom 0.15: CON5.2 18.93,31.64 18.48,32.09 14.48,32.09 14.03,31.64 CON6.2 12.95,31.64 12.33,31.02 12.33,23.57 11.17,22.42 9.6,22.42 8.6,21.42 8.4,21.42 8.08,21.09 IC4.7
N$51  (via drill 0.2 pad 0.55)
  Route15 0.2: v8.55,34.82 8.2,34.82 6,32.62 6,24.97 MODULE2.31
  Bottom 0.2: R20.1 10.7,31.99 10.7,32.49 9.98,33.21 9.98,34.57 D4.3 9.18,34.97 8.7,34.97 v8.55,34.82
N$52
  Bottom 0.2: R19.2 11.08,28.97 10.93,28.82 10.35,28.82 10.2,28.97 CON1.3
N$54
  Bottom 0.2: CON1.2 11.18,28.32 11.5,28.64 11.5,30.44 10.95,30.99 R20.2
N$55  (via drill 0.2 pad 0.55)
  Route15 0.2: v8.55,34.07 7.95,34.07 6.35,32.47 6.35,24.82 6,24.47 6,22.97 MODULE2.32
  Bottom 0.2: R19.1 10.88,29.97 10.33,30.52 10.33,32.37 9.43,33.27 D4.2 8.58,34.07 v8.55,34.07
N$58  (via drill 0.2 pad 0.55)
  Top 0.2: R13.1 v18.85,46.99
  Bottom 0.15: v18.85,46.99 18.6,47.24 16.18,47.24 15.5,47.92 14.98,47.92 14.83,48.08 14.83,48.39 LED3.R
N$59  (via drill 0.2 pad 0.55)
  Top 0.2: v19.9,46.99 R12.1
  Bottom 0.15: v19.9,46.99 19.33,47.57 16.3,47.57 15.68,48.19 15.68,48.39 LED3.G
N$60  (via drill 0.2 pad 0.55)
  Top 0.2: v20.95,46.99 R11.1
  Bottom 0.15: v20.95,46.99 20.61,46.99 19.73,47.87 16.5,47.87 16,48.37 16,49.47 15.43,50.04 LED3.B
PGND  (via drill 0.2 pad 0.55, 0.25 pad 0.55)
  Top 0.2: 32.65,28.97 32.81,28.81
  other vias: 52.53,33.37 52.53,33.92 52.53,34.47 52.53,32.82 52.53,22.37 52.53,22.92 52.53,23.47 52.53,21.82 52.53,19.62 52.53,20.17 52.53,20.72 52.53,19.07 52.53,24.57 52.53,25.12 52.53,25.67 52.53,24.02 52.53,26.77 52.53,27.32 52.53,27.87 52.53,26.22 52.53,28.97 52.53,29.52 52.53,30.07 52.53,28.42 52.53,31.17 52.53,31.72 52.53,32.27 52.53,30.62 52.53,21.27 52.53,35.57 52.53,36.12 52.53,36.67 52.53,35.02 52.53,37.77 52.53,38.32 52.53,38.87 52.53,37.22 35.38,7.37 34.83,7.37 34.83,6.82 35.38,6.82 34.83,7.92 35.38,7.92 35.13,49.92 34.58,49.92 34.58,51.02 35.13,51.02 34.58,50.47 35.13,50.47 30.63,25.64 30.63,25.09 30.63,24.54 30.63,23.99 30.63,23.44 34.78,25.84 34.78,25.29 34.78,24.74 34.78,24.19 34.78,23.64 30.63,34.22 30.63,33.67 30.63,33.12 30.63,32.57 30.63,34.77 34.78,34.07 34.78,33.52 34.78,32.97 34.78,32.42
  pour Top (no thermals): 36.4,23.12 36.4,35.53 30.4,35.53 30.4,23.12
  pour Top (no thermals): 51.95,18.77 53.83,18.77 53.83,39.17 51.95,39.17
  pour Route2 (no thermals): 30.2,54.37 30.2,3.57 53.7,3.57 53.7,54.37
  pour Top (no thermals): 42.6,5.17 34.6,5.17 34.6,8.12 42.6,8.12
  pour Top (no thermals): 42.5,49.77 37,49.77 37,52.87 42.5,52.87
  pour Bottom (no thermals): 35,21.87 30.2,21.87 30.2,35.47 35,35.47
  pour Bottom (no thermals): 23.75,12.72 23.75,7.27 34.4,7.27 34.4,6.62 35.63,6.62 35.63,9.77 26.65,9.77 26.65,12.72
  pour Top (no thermals): 34.43,52.87 38.4,52.87 38.4,49.77 34.43,49.77
PHASE_A  (via drill 0.2 pad 0.55)
  Route15 0.3: v34.15,14.62 32.7,14.62 29.35,17.97 MODULE2.2
  other vias: 34.15,14.07 34.7,14.07 35.25,14.07 35.8,14.07 36.35,14.07 36.9,14.07 34.7,14.62 35.25,14.62 35.8,14.62 36.35,14.62 36.9,14.62 34.15,13.52 34.7,13.52 35.25,13.52 35.8,13.52 36.35,13.52 36.9,13.52 34.15,12.42 34.7,12.42 35.25,12.42 35.8,12.42 36.35,12.42 36.9,12.42 34.15,12.97 34.7,12.97 35.25,12.97 35.8,12.97 36.35,12.97 36.9,12.97 34.15,11.87 34.7,11.87 35.25,11.87 35.8,11.87 36.35,11.87 36.9,11.87 34.15,10.77 34.7,10.77 35.25,10.77 35.8,10.77 36.35,10.77 36.9,10.77 34.15,11.32 34.7,11.32 35.25,11.32 35.8,11.32 36.35,11.32 36.9,11.32 38,20.62 38.55,20.62 39.1,20.62 39.65,20.62 40.2,20.62 40.75,20.62 38,21.17 38.55,21.17 39.1,21.17 39.65,21.17 40.2,21.17 40.75,21.17 38,20.07 38.55,20.07 39.1,20.07 39.65,20.07 40.2,20.07 40.75,20.07 38,18.97 38.55,18.97 39.1,18.97 39.65,18.97 40.2,18.97 40.75,18.97 38,19.52 38.55,19.52 39.1,19.52 39.65,19.52 40.2,19.52 40.75,19.52 38,18.42 38.55,18.42 39.1,18.42 39.65,18.42 40.2,18.42 40.75,18.42 38,17.32 38.55,17.32 38,17.87 38.55,17.87 39.1,17.87 39.65,17.87 40.2,17.87 40.75,17.87
  pour Top (rank 3, no thermals): 43.85,21.77 37.2,21.77 37.2,16.87 33.6,16.87 33.6,8.42 43.85,8.42
  pour Bottom (rank 2, no thermals): 30.2,21.37 30.2,3.57 41.4,3.57 41.4,21.37
PHASE_A_CURRENT_SHUNT_N  (via drill 0.2 pad 0.55)
  Top 0.15: R18.S1 v32.7,17.74
  Route2 0.15: v32.7,17.74 32.7,21.59 32.23,22.07 30.69,22.07 29.83,22.93 29.83,30.29 29.05,31.07 29.05,40.52 28.75,40.82 28.4,40.82 28,40.42 MODULE2.13
PHASE_A_CURRENT_SHUNT_P  (via drill 0.2 pad 0.55)
  Top 0.15: R18.S2 v32.7,26.69
  Route2 0.15: v32.7,26.69 32.7,22.84 32.24,22.38 30.85,22.38 30.13,23.11 30.13,30.42 29.35,31.19 29.35,40.64 28.87,41.12 28.4,41.12 28,41.52 MODULE2.14
PHASE_A_GATE_HIGH
  Top 0.3: MODULE2.1 28,9.64 28.6,9.04 39.5,9.04 | R14.1 39.5,9.04 | 39.5,9.04 R15.1
PHASE_A_GATE_LOW
  Top 0.3: MODULE2.3 29.35,18.62 29.35,11.42 28.98,11.04 R16.1 R17.1
PHASE_A_GND  (via drill 0.2 pad 0.55)
  Route15 0.3: MODULE2.4 29.83,21.97 v30.63,21.17
  other vias: 30.63,20.62 30.63,20.07 30.63,19.52 30.63,18.97 30.63,18.42 34.78,21.17 34.78,20.62 34.78,20.07 34.78,19.52 34.78,18.97 34.78,18.42 30.6,11.94 30.6,12.49 30.6,13.04 30.6,13.59 30.6,14.14 30.6,14.69 30.6,15.24 30.6,15.79
  pour Top (rank 2, no thermals): 33,11.67 30.4,11.67 30.4,21.42 36.4,21.42 36.4,17.87 35,17.87 33,15.87
  pour Bottom (no thermals): 32.73,11.74 30.4,11.74 30.4,21.42 34.95,21.42 34.95,15.47 32.73,15.47
PHASE_B  (via drill 0.2 pad 0.55)
  Bottom 0.3: MODULE2.6 28.2,25.97 29.95,27.72 29.95,35.07 30.98,36.09 34.98,36.09 35.6,36.72 v37.95,36.72
  other vias: 34.1,43.82 34.65,43.82 35.2,43.82 35.75,43.82 36.3,43.82 36.85,43.82 34.1,43.27 34.65,43.27 35.2,43.27 35.75,43.27 36.3,43.27 36.85,43.27 34.1,44.37 34.65,44.37 35.2,44.37 35.75,44.37 36.3,44.37 36.85,44.37 34.1,45.47 34.65,45.47 35.2,45.47 35.75,45.47 36.3,45.47 36.85,45.47 34.1,44.92 34.65,44.92 35.2,44.92 35.75,44.92 36.3,44.92 36.85,44.92 34.1,46.02 34.65,46.02 35.2,46.02 35.75,46.02 36.3,46.02 36.85,46.02 34.1,47.12 34.65,47.12 35.2,47.12 35.75,47.12 36.3,47.12 36.85,47.12 34.1,46.57 34.65,46.57 35.2,46.57 35.75,46.57 36.3,46.57 36.85,46.57 37.95,40.02 38.5,40.02 39.05,40.02 39.6,40.02 40.15,40.02 40.7,40.02 37.95,39.47 38.5,39.47 39.05,39.47 39.6,39.47 40.15,39.47 40.7,39.47 37.95,38.37 38.5,38.37 39.05,38.37 39.6,38.37 40.15,38.37 40.7,38.37 37.95,38.92 38.5,38.92 39.05,38.92 39.6,38.92 40.15,38.92 40.7,38.92 37.95,37.82 38.5,37.82 39.05,37.82 39.6,37.82 40.15,37.82 40.7,37.82 38.5,36.72 39.05,36.72 39.6,36.72 40.15,36.72 40.7,36.72 37.95,37.27 38.5,37.27 39.05,37.27 39.6,37.27 40.15,37.27 40.7,37.27 37.95,40.57
  pour Top (rank 3, no thermals): 43.85,36.17 37.25,36.17 37.25,41.89 33.75,41.89 33.75,49.32 43.85,49.32
  pour Bottom (rank 2, no thermals): 30.2,54.37 30.2,36.52 41.4,36.52 41.4,54.37
PHASE_B_CURRENT_SHUNT_N  (via drill 0.2 pad 0.55)
  Top 0.15: v32.6,40.19 32.6,38.32 R5.S1
  Route2 0.15: v32.6,40.19 32.7,40.09 32.7,36.27 32.3,35.87 30.96,35.87 30.1,36.73 30.1,42.13 28.71,43.52 27.64,43.52 25.89,41.77 24.91,41.77 24.66,42.03 24.66,42.33 25.3,42.97 MODULE2.15
PHASE_B_CURRENT_SHUNT_P  (via drill 0.2 pad 0.55)
  Top 0.15: v32.7,31.24 R5.S2
  Route2 0.15: 24.44,41.81 24.79,41.47 26.01,41.47 27.76,43.22 28.59,43.22 29.8,42.01 29.8,36.61 30.84,35.57 32.3,35.57 32.7,35.17 v32.7,31.24 | 24.44,41.81 | 24.44,41.81 24.36,41.9 24.36,42.32 23.71,42.97 MODULE2.16
PHASE_B_GATE_HIGH  (via drill 0.2 pad 0.55)
  Top 0.3: v46.25,42.02 R1.1 | R2.1 41.95,41.62 v41.95,41.52
  Route15 0.3: MODULE2.5 27.85,23.97 25.7,26.12 25.7,39.17 27.5,40.97 29.3,40.97 30.3,41.97 37.65,41.97 38.85,40.77 41.2,40.77 v41.95,41.52 42.45,42.02 v46.25,42.02
PHASE_B_GATE_LOW  (via drill 0.2 pad 0.55)
  Top 0.3: v32.55,41.02 32.65,40.92 33.15,40.92 R3.1 33.3,40.84 34.3,41.84 R4.1
  Route15 0.3: MODULE2.7 26.3,29.67 26.3,37.92 27.4,39.02 28.85,39.02 30.85,41.02 v32.55,41.02
PHASE_B_GND  (via drill 0.2 pad 0.55)
  Bottom 0.3: MODULE2.8 28.1,29.97 29.4,31.27 29.4,35.72 v30.63,36.94
  other vias: 30.63,39.69 30.63,38.59 30.63,38.04 30.63,37.49 34.78,39.69 34.78,39.14 34.78,38.59 34.78,38.04 34.78,37.49 30.63,47.14 30.63,46.59 30.63,46.04 30.63,45.49 30.63,44.94 30.63,44.39 30.63,43.84 30.63,43.29 30.63,39.14
  pour Top (rank 4, no thermals): 36.4,47.37 30.4,47.37 30.4,36.62 36.4,36.62
  pour Bottom: 30.59,36.71 30.2,36.7 30.2,39.87 34.98,39.87 34.98,36.74 30.55,36.74
  pour Bottom (no thermals): 30.2,47.39 33.33,47.39 33.33,41.49 35,41.49 35,36.32 30.2,36.31
PHASE_C  (via drill 0.2 pad 0.55)
  Route15 0.2: MODULE2.10 26.95,35.02 26.95,36.39 27.51,36.94 28.53,36.94 29.55,35.92 32.8,35.92 34.05,34.67 37.95,34.67 v37.95,34.57
  other vias: 37.95,25.62 38.5,25.62 39.05,25.62 39.6,25.62 40.15,25.62 40.7,25.62 37.95,24.52 38.5,24.52 39.05,24.52 39.6,24.52 40.15,24.52 40.7,24.52 37.95,25.07 38.5,25.07 39.05,25.07 39.6,25.07 40.15,25.07 40.7,25.07 37.95,23.97 38.5,23.97 39.05,23.97 39.6,23.97 40.15,23.97 40.7,23.97 37.95,22.87 38.5,22.87 39.05,22.87 39.6,22.87 40.15,22.87 40.7,22.87 37.95,23.42 38.5,23.42 39.05,23.42 39.6,23.42 40.15,23.42 40.7,23.42 38.5,34.57 39.05,34.57 39.6,34.57 40.15,34.57 40.7,34.57 38.5,35.12 39.05,35.12 39.6,35.12 40.15,35.12 40.7,35.12 37.95,34.02 38.5,34.02 39.05,34.02 39.6,34.02 40.15,34.02 40.7,34.02 37.95,32.92 38.5,32.92 39.05,32.92 39.6,32.92 40.15,32.92 40.7,32.92 37.95,33.47 38.5,33.47 39.05,33.47 39.6,33.47 40.15,33.47 40.7,33.47 37.95,32.37 38.5,32.37 39.05,32.37 39.6,32.37 40.15,32.37 40.7,32.37 37.95,31.27 38.5,31.27 39.05,31.27 39.6,31.27 40.15,31.27 40.7,31.27 37.95,31.82 38.5,31.82 39.05,31.82 39.6,31.82 40.15,31.82 40.7,31.82 37.95,35.12
  pour Top (no thermals): 43.85,35.62 37.5,35.62 37.5,22.27 43.85,22.27
  pour Bottom (rank 2, no thermals): 30.2,36.07 30.2,21.87 41.4,21.87 41.4,36.07
PHASE_C_GATE_HIGH  (via drill 0.2 pad 0.55)
  Top 0.3: R21.1 R22.1 v42.3,28.57
  Route15 0.3: MODULE2.9 28.1,31.87 33.47,31.87 38.47,26.87 40.9,26.87 42.3,28.27 v42.3,28.57
PHASE_C_GATE_LOW  (via drill 0.2 pad 0.55)
  Top 0.3: R23.1 R24.1 36.15,29.57 36.15,30.16 v36.04,30.26
  Route15 0.3: MODULE2.11 28.68,35.97 29.25,35.39 30.87,35.39 36.01,30.26 v36.04,30.26
PHASE_C_GND  (1 unrouted)
  Route15 0.2: MODULE2.12 28.3,37.97 29.9,36.37 33.03,36.37 34.08,35.32 S1.IN
TEMPERATURE_SENSOR  (via drill 0.2 pad 0.55)
  Top 0.3: IC5.2 28.8,45.79 23.25,45.79 v22.95,45.49
  Bottom 0.3: v22.95,45.49 22.23,45.49 21.5,44.77 21.5,44.57 C13.2 21.5,44.47 MODULE2.17
UART_RX
  Top 0.2: R29.2 17.45,52.42 14.2,49.17 14.2,46.17 12.05,44.02 10.55,44.02 MODULE2.20
UART_TX
  Top 0.2: R28.2 17.48,51.12 16.68,51.12 14.6,49.04 14.6,45.92 11.65,42.97 MODULE2.19
USB_VBUS  (via drill 0.2 pad 0.55)
  Top 0.2: v8.15,33.47 8.75,33.47 10.25,34.97 v10.25,35.17
  Bottom 0.2: D4.4 v10.25,35.17
  Bottom 0.4: D2.A 7.58,24.09 7.58,27.14 8.1,27.67 | CON1.1 8.1,27.67 | R6.2 v8.15,33.47 8.15,27.72 8.1,27.67
VDC  (via drill 0.2 pad 0.55)
  Route15 1.5: MODULE2.42 29.85,10.62 31.4,10.62
  other vias: 44.6,46.57 45.15,46.57 45.7,46.57 46.25,46.57 46.8,46.57 47.35,46.57 44.6,47.12 45.15,47.12 45.7,47.12 46.25,47.12 46.8,47.12 47.35,47.12 44.6,46.02 45.15,46.02 45.7,46.02 46.25,46.02 46.8,46.02 47.35,46.02 44.6,44.92 45.15,44.92 45.7,44.92 46.25,44.92 46.8,44.92 47.35,44.92 44.6,45.47 45.15,45.47 45.7,45.47 46.25,45.47 46.8,45.47 47.35,45.47 44.6,44.37 45.15,44.37 45.7,44.37 46.25,44.37 46.8,44.37 47.35,44.37 44.6,43.27 45.15,43.27 45.7,43.27 46.25,43.27 46.8,43.27 47.35,43.27 44.6,43.82 45.15,43.82 45.7,43.82 46.25,43.82 46.8,43.82 47.35,43.82 45.2,40.17 45.75,40.17 46.3,40.17 46.85,40.17 47.4,40.17 47.95,40.17 45.2,40.72 45.75,40.72 46.3,40.72 46.85,40.72 47.4,40.72 47.95,40.72 45.2,39.62 45.75,39.62 46.3,39.62 46.85,39.62 47.4,39.62 47.95,39.62 45.2,38.52 45.75,38.52 46.3,38.52 46.85,38.52 47.4,38.52 47.95,38.52 45.2,39.07 45.75,39.07 46.3,39.07 46.85,39.07 47.4,39.07 47.95,39.07 45.2,37.97 45.75,37.97 46.3,37.97 46.85,37.97 47.4,37.97 47.95,37.97 45.2,36.87 45.75,36.87 46.3,36.87 46.85,36.87 47.4,36.87 47.95,36.87 45.2,37.42 45.75,37.42 46.3,37.42 46.85,37.42 47.4,37.42 47.95,37.42 45.15,34.77 45.7,34.77 46.25,34.77 46.8,34.77 47.35,34.77 47.9,34.77 45.15,35.32 45.7,35.32 46.25,35.32 46.8,35.32 47.35,35.32 47.9,35.32 45.15,34.22 45.7,34.22 46.25,34.22 46.8,34.22 47.35,34.22 47.9,34.22 45.15,33.12 45.7,33.12 46.25,33.12 46.8,33.12 47.35,33.12 47.9,33.12 45.15,33.67 45.7,33.67 46.25,33.67 46.8,33.67 47.35,33.67 47.9,33.67 45.15,32.57 45.7,32.57 46.25,32.57 46.8,32.57 47.35,32.57 47.9,32.57 45.15,32.02 45.7,32.02 46.25,32.02 46.8,32.02 47.35,32.02 47.9,32.02 45.2,25.87 45.75,25.87 46.3,25.87 46.85,25.87 47.4,25.87 47.95,25.87 45.2,25.32 45.75,25.32 46.3,25.32 46.85,25.32 47.4,25.32 47.95,25.32 45.2,24.22 45.75,24.22 46.3,24.22 46.85,24.22 47.4,24.22 47.95,24.22 45.2,24.77 45.75,24.77 46.3,24.77 46.85,24.77 47.4,24.77 47.95,24.77 45.2,23.67 45.75,23.67 46.3,23.67 46.85,23.67 47.4,23.67 47.95,23.67 45.2,22.57 45.75,22.57 46.3,22.57 46.85,22.57 47.4,22.57 47.95,22.57 45.2,23.12 45.75,23.12 46.3,23.12 46.85,23.12 47.4,23.12 47.95,23.12 45.15,20.52 45.7,20.52 46.25,20.52 46.8,20.52 47.35,20.52 47.9,20.52 45.15,21.07 45.7,21.07 46.25,21.07 46.8,21.07 47.35,21.07 47.9,21.07 45.15,19.97 45.7,19.97 46.25,19.97 46.8,19.97 47.35,19.97 47.9,19.97 45.15,18.87 45.7,18.87 46.25,18.87 46.8,18.87 47.35,18.87 47.9,18.87 45.15,19.42 45.7,19.42 46.25,19.42 46.8,19.42 47.35,19.42 47.9,19.42 45.15,18.32 45.7,18.32 46.25,18.32 46.8,18.32 47.35,18.32 47.9,18.32 45.15,17.22 45.7,17.22 46.25,17.22 46.8,17.22 47.35,17.22 47.9,17.22 45.15,17.77 45.7,17.77 46.25,17.77 46.8,17.77 47.35,17.77 47.9,17.77 44.6,14.07 45.15,14.07 45.7,14.07 46.25,14.07 46.8,14.07 47.35,14.07 44.6,14.62 45.15,14.62 45.7,14.62 46.25,14.62 46.8,14.62 47.35,14.62 44.6,13.52 45.15,13.52 45.7,13.52 46.25,13.52 46.8,13.52 47.35,13.52 44.6,12.42 45.15,12.42 45.7,12.42 46.25,12.42 46.8,12.42 47.35,12.42 44.6,12.97 45.15,12.97 45.7,12.97 46.25,12.97 46.8,12.97 47.35,12.97 44.6,11.87 45.15,11.87 45.7,11.87 46.25,11.87 46.8,11.87 47.35,11.87 44.6,10.77 45.15,10.77 45.7,10.77 46.25,10.77 46.8,10.77 47.35,10.77 44.6,11.32 45.15,11.32 45.7,11.32 46.25,11.32 46.8,11.32 47.35,11.32 32.88,5.97 33.43,5.97 33.43,6.52 32.88,6.52 33.43,5.42 32.88,5.42 30.53,5.99 30.53,6.54 30.53,5.44 32.88,51.97 33.43,51.97 33.43,52.52 32.88,52.52 33.43,51.42 32.88,51.42
  pour Top (rank 2, no thermals): 51.2,51.32 43.1,51.32 43.1,48.57 44.3,48.57 44.3,9.67 43.3,9.67 43.3,6.54 51.2,6.54
  pour Bottom (no thermals): 41.9,54.97 41.9,5.97 51.9,5.97 51.9,54.97
  pour Route15 (no thermals): 30.2,54.37 30.2,3.57 52.2,3.57 52.2,54.37
  pour Top (no thermals): 30.35,8.12 33.7,8.12 33.7,5.22 30.35,5.22
  pour Bottom (no thermals): 33.7,6.72 23.75,6.72 23.75,3.57 33.7,3.57
  pour Top (no thermals): 30.93,52.87 33.6,52.87 33.6,49.82 30.93,49.82
VDD_5V  (via drill 0.2 pad 0.55)
  Top 0.3: R27.2 24.35,44.84 21.65,44.84
  Top 0.4: D7.2 D7.5 17.1,46.94
  Top 0.5: 21.5,16.09 23.78,16.09 25.28,17.59 25.28,35.54 23.88,36.94 20.38,36.94 | v13.08,37.49 v13.08,36.94 20.38,36.94 | 20.38,36.94 20.38,43.57 21.65,44.84 21.65,47.67 | 21.5,16.09 MODULE2.40 20.75,14.22 20.75,12.97 | 21.5,16.09 10.98,16.09 | 10.98,16.09 v10.88,15.99 | 7.38,16.82 v9.4,16.82 9.77,16.82 10.49,16.09 10.98,16.09 | v7.38,16.09 7.38,16.82 | 7.38,16.82 6.5,16.82 v6.05,17.27 | 17.1,46.94 17.83,47.67 21.65,47.67 | CON8.4 27,52.27 27,48.62 26.05,47.67 21.65,47.67 | 14.85,11.94 14.93,12.02 R26.2 18.55,12.02 | IC6.2 14.85,12.97 14.85,11.94 | 14.85,11.94 v14.85,11.32 v14.85,10.77 | 18.55,12.02 v18.55,11.32 v18.55,10.77 | 18.55,12.02 18.55,12.34 19.23,13.02 C15.2 20.7,13.02 20.75,12.97 | 20.75,12.97 C45.1
  Route15 0.5: v9.14,23.86 9.14,23.01 11.73,20.43 11.73,18.42 14.03,16.12 20.08,16.12 21.23,14.97 MODULE2.40
  Bottom 0.2: IC3.5 9.75,20.57 9.4,20.22 v9.4,16.82 | IC4.5 6.45,20.57 6.1,20.22 6.1,17.32 v6.05,17.27
  Bottom 0.3: v7.38,16.09 7.23,16.24 C12.1 7.43,17.04 IC4.3 | IC3.3 10.73,16.97 | 10.73,16.97 C11.1 | 10.73,16.97 10.73,16.14 v10.88,15.99
  Bottom 0.5: F1.P$2 11.68,37.49 v13.08,37.49 | 27,51.47 28.2,52.67 CON8.4 | LED2.A 27,51.47 | 27,51.47 24,51.47 | 24,51.47 18,51.47 | 18,51.47 15.15,51.47 14.55,50.87 14.55,50.12 LED3.+ | LED5.A 18,51.47 | LED1.A 24,51.47 | C4.1 15.9,9.17 IC1.3 | C3.1 18.95,10.62 IC2.3
  other vias: 8.59,24.41 9.14,24.41 8.59,23.84
  pour Bottom (no thermals): 10.98,24.59 8.43,24.59 8.43,23.59 10.98,23.59
  pour Top (no thermals): 9.4,24.62 8.38,24.62 8.38,23.62 9.4,23.62
  pour Bottom (no thermals): 11.78,37.67 13.38,37.67 13.38,36.69 11.78,36.69
  pour Route15 (no thermals): 9.4,24.62 8.38,24.62 8.38,23.62 9.4,23.62
  pour Bottom (no thermals): 19.5,10.12 18.35,10.12 18.35,11.52 19.5,11.52
  pour Bottom (no thermals): 16.1,10.12 14.65,10.12 14.65,11.52 16.1,11.52

## Text on the board
Top: Zubax Komar 1.0
tPlace: Propelled / by Télega
bPlace: T | GND
tNames: CON100 | CON103 | CON104 | CON105 | CON101 | CON102